# EAGLE board Macropad (EAGLE 9.6.2)
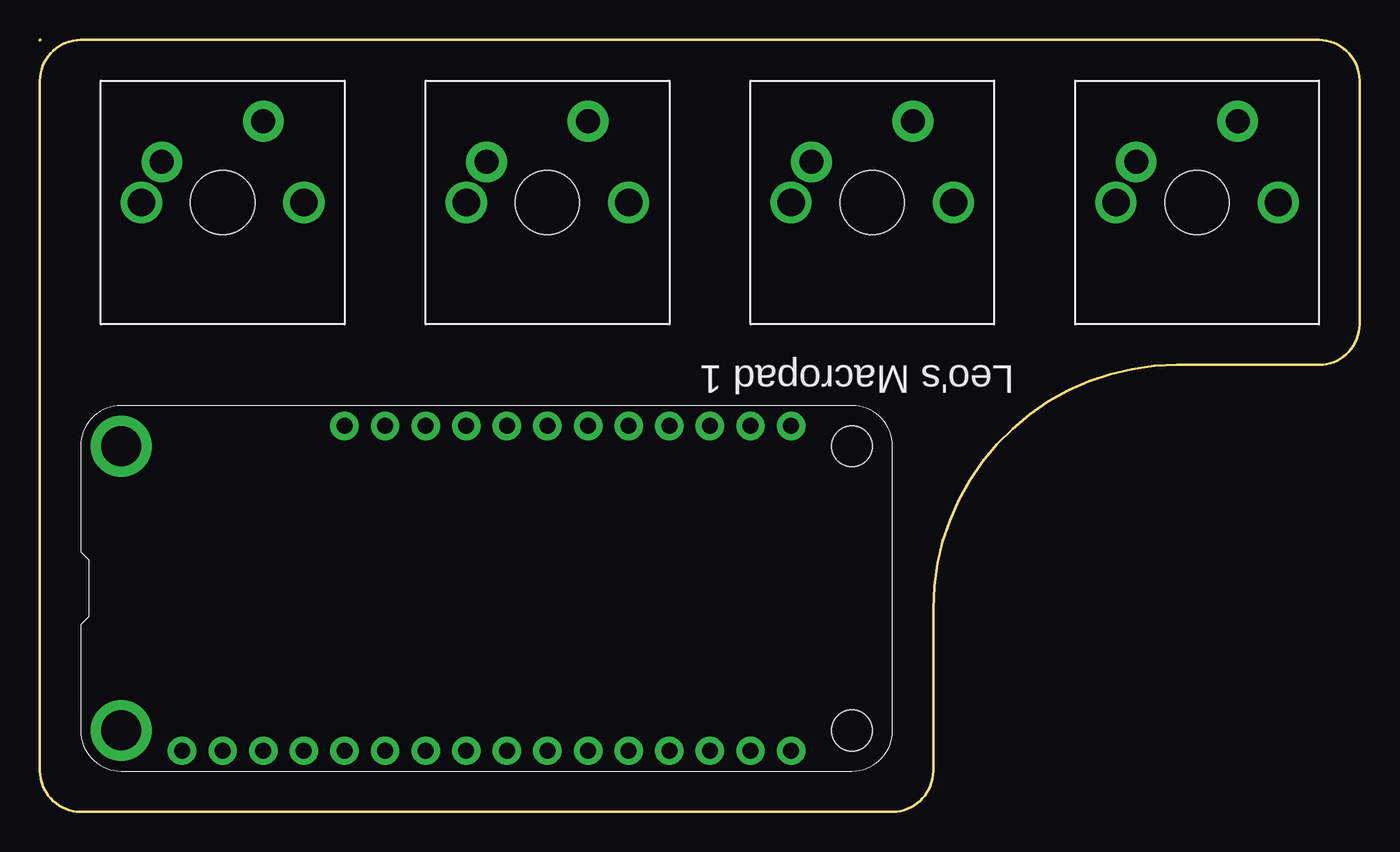
[diagram p0: board, top side]
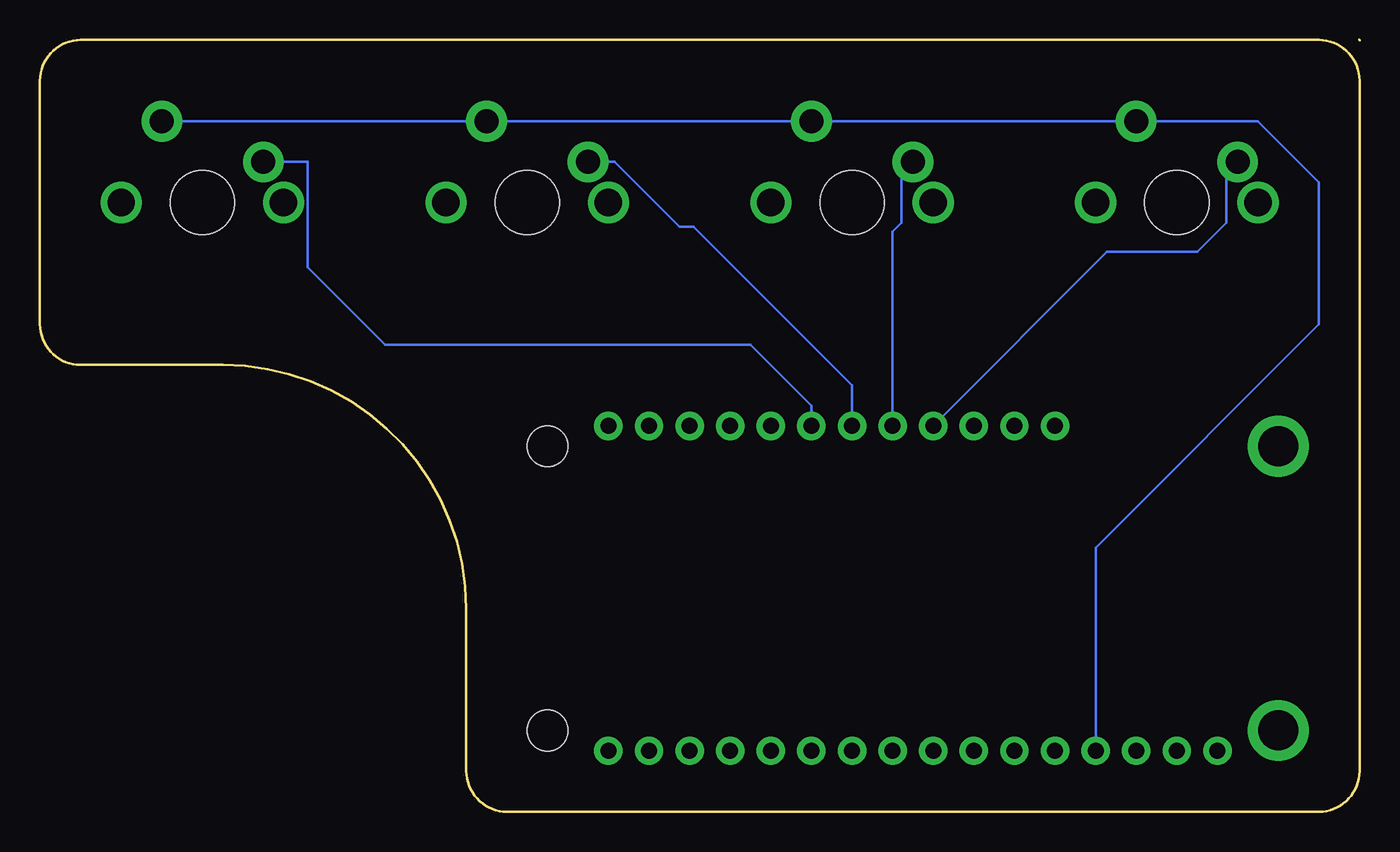
[diagram p1: board, bottom side, seen from below]

Size 82.55 x 48.26 mm. Coordinates in mm from the lower left corner, seen from the top.
Outline: 0,48.26 arc-90 0,48.26
Outline: 55.88,12.7 arc-90 71.12,27.94 80.01,27.94 arc90 82.55,30.48 82.55,45.72 arc90 80.01,48.26 2.54,48.26 arc90 0,45.72 0,2.54 arc90 2.54,0 53.34,0 arc90 55.88,2.54 55.88,12.7
Copper layers (1*16): Top 0.035mm / dielectric 1.5mm / Bottom 0.035mm
Design rules "default": minimum track width 6mil, minimum drill 0.35mm, track to track 6mil, track to pad 6mil, pad to pad 6mil, via to via 6mil, smd to smd 6mil, copper to edge 40mil, drill to drill 6mil, minimum pad ring 10mil, minimum via ring 8mil, stop-mask expansion 4mil, vias tented up to drill 0mil, thermal gap 10mil

## Footprints (pad centres in the part's own frame; a part is rotated, then mirrored left to right if it is on the bottom)
CHERRY-MX = drill 1.714 pad 1.93: P$3 -5.08,0; P$4 5.08,0 | drill 1.5 pad 2.54: SW1 -3.81,2.54; SW2 2.54,5.08 | hole 4: 0,0
FEATHERWING_DIM = drill 1 pad 1.778: 1 6.35,1.27; 2 8.89,1.27; 3 11.43,1.27; 4 13.97,1.27; 5 16.51,1.27; 6 19.05,1.27; 7 21.59,1.27; 8 24.13,1.27; 9 26.67,1.27; 10 29.21,1.27; 11 31.75,1.27; 12 34.29,1.27; 13 36.83,1.27; 14 39.37,1.27; 15 41.91,1.27; 16 44.45,1.27; 17 44.45,21.59; 18 41.91,21.59; 19 39.37,21.59; 20 36.83,21.59; 21 34.29,21.59; 22 31.75,21.59; 23 29.21,21.59; 24 26.67,21.59; 25 24.13,21.59; 26 21.59,21.59; 27 19.05,21.59; 28 16.51,21.59 | drill 2.5 pad 3.81: P$1 2.54,20.32; P$2 2.54,2.54 | hole 2.54: 48.26,20.32; 48.26,2.54

## Placement (x,y rotation side)
KEY_1  CHERRY-MX  [CHERRY-MX]  11.43,38.1 0 top
KEY_2  CHERRY-MX  [CHERRY-MX]  31.75,38.1 0 top
KEY_3  CHERRY-MX  [CHERRY-MX]  52.07,38.1 0 top
KEY_4  CHERRY-MX  [CHERRY-MX]  72.39,38.1 0 top
MS1  FEATHERWING_NODIM  [FEATHERWING_DIM]  2.54,2.54 0 top

## Library data of the parts
KEY_1-KEY_4 = cherrymx
MS1 = adafruit

## Nets
GND: KEY_1.SW2 KEY_2.SW2 KEY_3.SW2 KEY_4.SW2 MS1.4
N$1: KEY_1.SW1 MS1.25
N$2: KEY_2.SW1 MS1.24
N$3: KEY_3.SW1 MS1.23
N$4: KEY_4.SW1 MS1.22

## Tracks (layer width: path | path; a pad name or v marks a point on that pad's centre or on a via)
GND
  Bottom 0.152: KEY_4.SW2 KEY_3.SW2 KEY_2.SW2 KEY_1.SW2 6.35,43.18 2.54,39.37 2.54,30.48 16.51,16.51 MS1.4
N$1
  Bottom 0.152: KEY_1.SW1 8.34,39.92 8.34,36.82 10.15,35.01 15.79,35.01 MS1.25
N$2
  Bottom 0.152: MS1.24 29.21,36.27 28.66,36.82 28.66,39.92 KEY_2.SW1
N$3
  Bottom 0.152: KEY_3.SW1 46.59,40.64 42.54,36.59 41.67,36.59 31.75,26.67 MS1.23
N$4
  Bottom 0.152: KEY_4.SW1 65.8,40.64 65.8,34.05 60.96,29.21 38.1,29.21 34.29,25.4 MS1.22

## Text on the board
tPlace: Leo's Macropad 1